# EAGLE board CT_schematic (EAGLE 7.6.0)

Size 100 x 80 mm. Coordinates in mm from the lower left corner, seen from the top.
Outline: 0,0 100,0 100,80 0,80 0,0
Copper layers (1*16): Top 0.035mm / dielectric 1.5mm / Bottom 0.035mm
Design rules "default": minimum track width 10mil, minimum drill 24mil, track to track 8mil, track to pad 8mil, pad to pad 8mil, via to via 8mil, smd to smd 8mil, copper to edge 40mil, drill to drill 8mil, minimum pad ring 10mil, minimum via ring 8mil, stop-mask expansion 4mil, vias tented up to drill 0mil, thermal gap 10mil

## Footprints (pad centres in the part's own frame; a part is rotated, then mirrored left to right if it is on the bottom)
C0603 = smd 0.8 x 0.8: 1 -0.762,0; 2 0.762,0
C0402 = smd 0.5 x 0.5: 1 -0.508,0; 2 0.508,0
C0805 = smd 1.2 x 1.3: 1 -1.016,0; 2 1.016,0
C1206 = smd 1.3 x 1.6: 1 -1.524,0; 2 1.524,0
L0603 = smd 0.8 x 0.8: 1 -0.762,0; 2 0.762,0
L0806 = smd 1.016 x 1.524: 1 -0.889,0; 2 0.889,0
R0603 = smd 0.8 x 0.8: 1 -0.762,0; 2 0.762,0
WLCSP63 = smd 0.25 x 0.25: A1 -1.2,1.6; A2 -0.8,1.6; A3 -0.4,1.6; A4 0,1.6; A5 0.4,1.6; A6 0.8,1.6; A7 1.2,1.6; B1 -1.2,1.2; B2 -0.8,1.2; B3 -0.4,1.2; B4 0,1.2; B5 0.4,1.2; B6 0.8,1.2; B7 1.2,1.2; C1 -1.2,0.8; C2 -0.8,0.8; C3 -0.4,0.8; C4 0,0.8; C5 0.4,0.8; C6 0.8,0.8; C7 1.2,0.8; D1 -1.2,0.4; D2 -0.8,0.4; D3 -0.4,0.4; D4 0,0.4; D5 0.4,0.4; D6 0.8,0.4; D7 1.2,0.4; E1 -1.2,0; E2 -0.8,0; E3 -0.4,0; E4 0,0; E5 0.4,0; E6 0.8,0; E7 1.2,0; F1 -1.2,-0.4; F2 -0.8,-0.4; F3 -0.4,-0.4; F4 0,-0.4; F5 0.4,-0.4; F6 0.8,-0.4; F7 1.2,-0.4; G1 -1.2,-0.8; G2 -0.8,-0.8; G3 -0.4,-0.8; G4 0,-0.8; G5 0.4,-0.8; G6 0.8,-0.8; G7 1.2,-0.8; H1 -1.2,-1.2; H2 -0.8,-1.2; H3 -0.4,-1.2; H4 0,-1.2; H5 0.4,-1.2; H6 0.8,-1.2; H7 1.2,-1.2; J1 -1.2,-1.6; J2 -0.8,-1.6; J3 -0.4,-1.6; J4 0,-1.6; J5 0.4,-1.6; J6 0.8,-1.6; J7 1.2,-1.6
SOIC-8 = smd 1.6 x 0.6: 1 -2.7,1.905 | smd 1.55 x 0.6: 2 -2.7,0.635; 3 -2.7,-0.635; 4 -2.7,-1.905; 5 2.7,-1.905; 6 2.7,-0.635; 7 2.7,0.635; 8 2.7,1.905
FCI_10118193-0001LF = smd 0.4 x 1.35: 1 -1.3,2.675; 2 -0.65,2.675; 3 0,2.675; 4 0.65,2.675; 5 1.3,2.675 | smd 1.6 x 1.4: 6 -3.2,2.45; 7 3.2,2.45 | smd 1.9 x 1.9: 8 -1.2,0; 9 1.2,0 | hole 0.5: -3.3,0; 3.3,0
SOT143B = smd 1 x 0.7: 1 -0.75,-1 | smd 0.6 x 0.7: 2 0.95,-1; 3 0.95,1; 4 -0.95,1
ABS07-32.768KHZ-7-T = smd 1.1 x 2.4: 1 -2.5,0; 2 0,0
ASFL1 = smd 1.7 x 1.5: 1 -1.27,-1.1; 2 1.27,-1.1; 3 1.27,1.1; 4 -1.27,1.1
TSOT-23-5 = smd 1.3 x 0.62: 1 -1.31,0.95; 2 -1.31,0; 3 -1.31,-0.95; 4 1.31,-0.95; 5 1.31,0.95
DFN8_2X3MC = smd 0.813 x 0.305: 1 -1.398,0.75; 2 -1.398,0.25; 3 -1.398,-0.25; 4 -1.398,-0.75; 5 1.398,-0.75; 6 1.398,-0.25; 7 1.398,0.25; 8 1.398,0.75 | smd 1.753 x 1.549: 9 0,0
JST-2-SMD = smd 1 x 4.6: 1 -1,-3.7; 2 1,-3.7 | smd 1.6 x 3.4: NC1 -3.4,1.5; NC2 3.4,1.5
SON-6 = smd 0.55 x 0.3: 1 -0.355,0.5 | smd 0.52 x 0.3: 2 -0.37,0; 3 -0.37,-0.5; 4 0.37,-0.5; 5 0.37,0; 6 0.37,0.5
SW_4-1437565-2 = smd 1.4 x 2.1: 1 -2.23,4.55; 2 -2.23,-4.55; 3 2.23,4.55; 4 2.23,-4.55
LGM67K-G1J2-24-Z = smd 0.8 x 1.4: A -2,0; C 0,0
NC7SZ125M5X = smd 1.3 x 0.7: 1 -1.3,0.95; 2 -1.3,0; 3 -1.3,-0.95; 4 1.3,-0.95; 5 1.3,0.95
DUMMY_PACKAGE_118 = drill 0.3: 1 0,-1; 2 1.5,-1

## Placement (x,y rotation side)
C1  1e-07  [C0603]  -27.94,53.34 0 top  (outside the outline)
C2  1e-07  [C0603]  -31.75,53.34 0 top  (outside the outline)
C3  1e-07  [C0603]  -35.56,53.34 0 top  (outside the outline)
C4  1e-07  [C0603]  -39.37,53.34 0 top  (outside the outline)
C5  4.7e-06  [C0603]  -24.13,53.34 0 top  (outside the outline)
C6  1e-07  [C0603]  -43.18,53.34 0 top  (outside the outline)
C7  1e-08  [C0603]  -46.99,53.34 0 top  (outside the outline)
C8  1e-06  [C0603]  -50.8,53.34 0 top  (outside the outline)
C9  1e-11  [C0402]  -26.67,58.42 0 top  (outside the outline)
C10  1e-11  [C0402]  -30.48,58.42 0 top  (outside the outline)
C11  1e-08  [C0402]  -34.29,58.42 0 top  (outside the outline)
C12  1e-08  [C0402]  -38.1,58.42 0 top  (outside the outline)
C13  1e-08  [C0402]  -41.91,58.42 0 top  (outside the outline)
C14  1e-05  [C0805]  -27.94,41.91 0 top  (outside the outline)
C15  1e-05  [C0805]  -33.02,41.91 0 top  (outside the outline)
C16  1e-07  [C0402]  -45.72,58.42 0 top  (outside the outline)
C17  1e-05  [C1206]  -48.26,35.56 0 top  (outside the outline)
C18  1e-05  [C1206]  -54.61,35.56 0 top  (outside the outline)
C19  1e-08  [C0402]  -49.53,58.42 0 top  (outside the outline)
F1  240.0  [L0603]  -54.61,53.34 0 top  (outside the outline)
I1  3.3e-06  [L0806]  -16.51,41.91 0 top  (outside the outline)
R2  1000.0  [R0603]  -58.42,53.34 0 top  (outside the outline)
R4  4700.0  [R0603]  -15.24,58.42 0 top  (outside the outline)
R5  10000.0  [R0603]  -20.32,48.26 0 top  (outside the outline)
R6  10000.0  [R0603]  -25.4,48.26 0 top  (outside the outline)
R7  10000.0  [R0603]  -30.48,48.26 0 top  (outside the outline)
R8  10000.0  [R0603]  -35.56,48.26 0 top  (outside the outline)
R9  10000.0  [R0603]  -40.64,48.26 0 top  (outside the outline)
R10  10000.0  [R0603]  -45.72,48.26 0 top  (outside the outline)
R11  10000.0  [R0603]  -50.8,48.26 0 top  (outside the outline)
R12  220000.0  [R0603]  -50.8,41.91 0 top  (outside the outline)
R13  1000000.0  [R0603]  -45.72,41.91 0 top  (outside the outline)
R14  10000.0  [R0603]  -55.88,48.26 0 top  (outside the outline)
R15  10000.0  [R0603]  -15.24,53.34 0 top  (outside the outline)
R16  9100.0  [R0603]  -19.05,58.42 0 top  (outside the outline)
R17  680000.0  [R0603]  -55.88,41.91 0 top  (outside the outline)
R18  120000.0  [R0603]  -15.24,48.26 0 top  (outside the outline)
R19  2000.0  [R0603]  -22.86,58.42 0 top  (outside the outline)
R20  10000.0  [R0603]  -20.32,53.34 0 top  (outside the outline)
U1  STM32L151UCY6  [WLCSP63]  -52.07,26.67 0 top  (outside the outline)
U2  AT25040B-SSHL-T  [SOIC-8]  -24.13,17.78 0 top  (outside the outline)
U3  AT25320B-SSHL-T  [SOIC-8]  -40.64,17.78 0 top  (outside the outline)
U4  10118193-0001LF  [FCI_10118193-0001LF]  -35.56,26.67 0 top  (outside the outline)
U5  prtr5v0u2ax  [SOT143B]  -24.13,63.5 0 top  (outside the outline)
U6  ABS07-32.768KHZ-7-T  [ABS07-32.768KHZ-7-T]  -27.94,35.56 0 top  (outside the outline)
U7  ASFL1-25MHZ-NCS  [ASFL1]  -26.67,26.67 0 top  (outside the outline)
U8  ltc3406es5  [TSOT-23-5]  -38.1,40.64 0 top  (outside the outline)
U9  MCP73831T-2ACI/MC  [DFN8_2X3MC]  -38.1,62.23 0 top  (outside the outline)
U10  S2B-PH-SM4-TB(LF)(SN)  [JST-2-SMD]  -41.91,6.35 0 top  (outside the outline)
U11  TPS3895ADRYR  [SON-6]  -31.75,62.23 0 top  (outside the outline)
U12  4-1437565-2  [SW_4-1437565-2]  -27.94,6.35 0 top  (outside the outline)
U13  Q65110A2395  [LGM67K-G1J2-24-Z]  -36.83,35.56 0 top  (outside the outline)
U14  nc7sz125m5x  [NC7SZ125M5X]  -21.59,41.91 0 top  (outside the outline)
U15  Dummy  [DUMMY_PACKAGE_118]  -29.21,63.5 0 top  (outside the outline)

## Library data of the parts
C1-C19 F1 I1 R2 R4-R20 U1-U15 = circuit_tree

## Nets
CLK_CRYSTAL_U1_D6: C9.1 U1.D6 U6.1
CLK_CRYSTAL_U1_D7: C10.1 U1.D7 U6.2
CLK_U1_F6: U1.F6 U7.3
GND: C1.2 C2.2 C3.2 C4.2 C5.2 C6.2 C7.2 C8.2 C9.2 C10.2 C11.2 C12.2 C13.2 C14.2 C15.1 C15.2 C16.2 C17.2 C18.2 C19.2 R2.2 R5.2 R12.2 R16.2 R18.2 R19.2 U1.A1 U1.A7 U1.F5 U1.H5 U1.J1 U2.4 U3.4 U4.5 U4.6 U4.7 U4.8 U4.9 U5.1 U7.2 U8.2 U9.6 U9.9 U10.2 U11.2 U13.C U14.1 U14.3 U15.1
INPUT_USBPOWER_5V: C17.1 R20.2 U4.1 U5.4 U9.1 U9.2
NET_U1_A6: R5.1 U1.A6
NET_U1_C7: C6.1 U1.C7
NET_U1_E7: R4.1 U1.E7 U14.4
NET_U1_H7: C7.1 C8.1 F1.1 U1.H7
NET_U1_J6: U13.A
NET_U1_J7: U12.3 U12.4
NET_U2_3: R6.1 U2.3
NET_U2_7: R8.1 U2.7
NET_U3_3: R9.1 U3.3
NET_U3_7: R11.1 U3.7
NET_U8_1: U8.1
NET_U8_3: I1.1 U8.3
NET_U8_5: R12.1 R13.1 U8.5
NET_U8_ATNET_3: I1.2 R13.2
NET_U9_5: R20.1 U9.5
NET_U9_8: R19.1 U9.8
NET_U11_1: R15.1 R16.1 U11.1
NET_U11_3: R17.2 R18.1 U11.3
NET_U11_4: R14.1 U11.4 U14.2
NET_U12_1: R2.1 U12.1 U12.2
PROC_DAC_OUT2: U1.H4 U15.2
PROC_SPI1_MISO: U1.D4 U3.2
PROC_SPI1_MOSI: U1.A5 U3.5
PROC_SPI1_NSS: R10.1 U1.A2 U3.1
PROC_SPI1_SCK: U1.C4 U3.6
PROC_SPI2_MISO: U1.F3 U2.2
PROC_SPI2_MOSI: U1.F2 U2.5
PROC_SPI2_NSS: R7.1 U1.G2 U2.1
PROC_SPI2_SCK: U1.G1 U2.6
PROC_USB_DM: U1.B1 U4.2 U5.3
PROC_USB_DP: U1.D3 U4.3 U5.2
VCC_S1_3V7: C14.1 C18.1 U8.4 U9.3 U9.4 U10.1
VCC_TIER1_3V3: C1.1 C2.1 C3.1 C4.1 C5.1 C11.1 C12.1 C13.1 C15.2 C16.1 C19.1 F1.2 I1.2 R4.2 R6.2 R7.2 R8.2 R9.2 R10.2 R11.2 R13.2 R14.2 R15.2 R17.1 U1.B2 U1.B7 U1.H1 U2.8 U3.8 U7.4 U11.6 U14.5

## Tracks (layer width: path | path; a pad name or v marks a point on that pad's centre or on a via)
CLK_CRYSTAL_U1_D6  (2 unrouted)
CLK_CRYSTAL_U1_D7  (2 unrouted)
CLK_U1_F6  (1 unrouted)
GND  (48 unrouted)
INPUT_USBPOWER_5V  (5 unrouted)
NET_U1_A6  (1 unrouted)
NET_U1_C7  (1 unrouted)
NET_U1_E7  (2 unrouted)
NET_U1_H7  (3 unrouted)
NET_U1_J7  (1 unrouted)
NET_U2_3  (1 unrouted)
NET_U2_7  (1 unrouted)
NET_U3_3  (1 unrouted)
NET_U3_7  (1 unrouted)
NET_U8_3  (1 unrouted)
NET_U8_5  (2 unrouted)
NET_U8_ATNET_3  (1 unrouted)
NET_U9_5  (1 unrouted)
NET_U9_8  (1 unrouted)
NET_U11_1  (2 unrouted)
NET_U11_3  (2 unrouted)
NET_U11_4  (2 unrouted)
NET_U12_1  (2 unrouted)
PROC_DAC_OUT2  (1 unrouted)
PROC_SPI1_MISO  (1 unrouted)
PROC_SPI1_MOSI  (1 unrouted)
PROC_SPI1_NSS  (2 unrouted)
PROC_SPI1_SCK  (1 unrouted)
PROC_SPI2_MISO  (1 unrouted)
PROC_SPI2_MOSI  (1 unrouted)
PROC_SPI2_NSS  (2 unrouted)
PROC_SPI2_SCK  (1 unrouted)
PROC_USB_DM  (2 unrouted)
PROC_USB_DP  (2 unrouted)
VCC_S1_3V7  (5 unrouted)
VCC_TIER1_3V3  (31 unrouted)